# Altium PCB Main.PcbDoc
Units mm, origin at the board's own origin, x right, y up, seen from the top; angles counter-clockwise.
Board outline 99 x 71 mm, 4 copper layers (Top Layer, Ground Layer, Power Layer, Bottom Layer), stack 1.591 mm thick; 56 components, 26 nets, 200 pads, 145 vias.
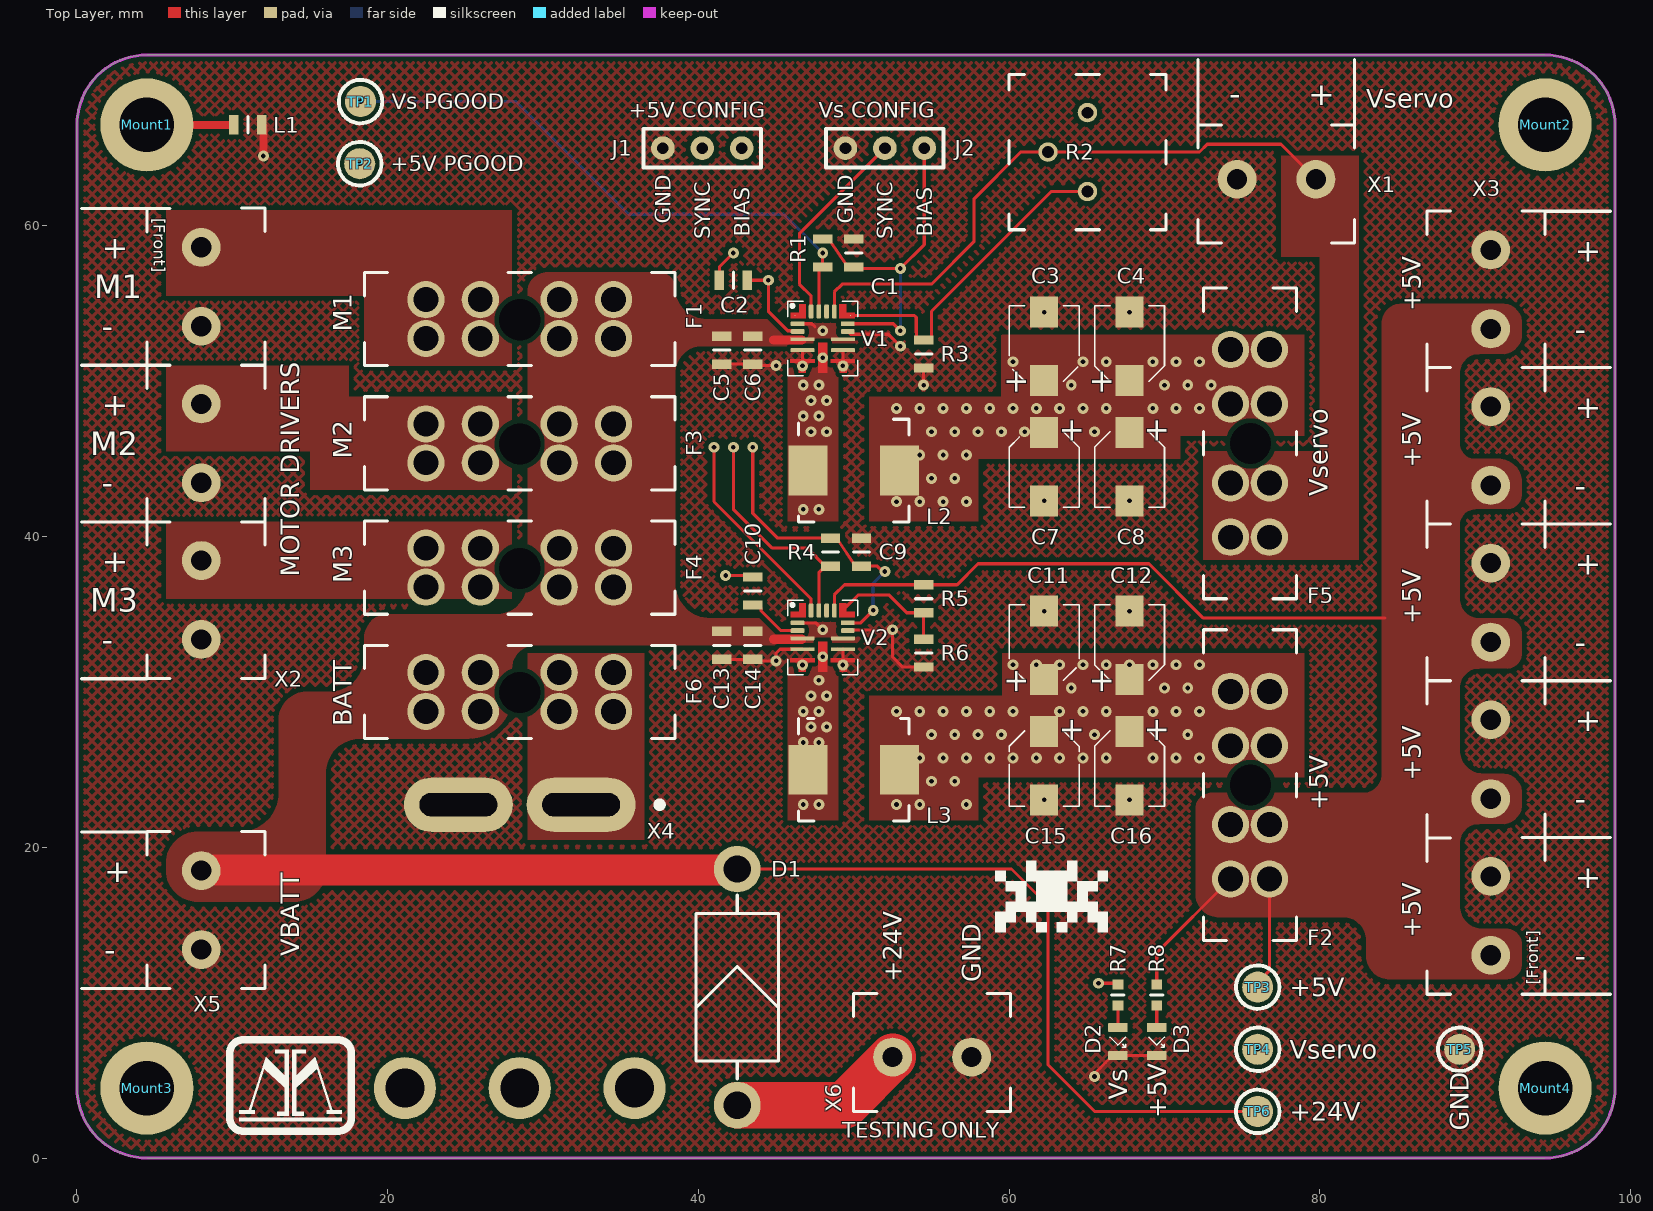
[diagram p0: Top Layer view]
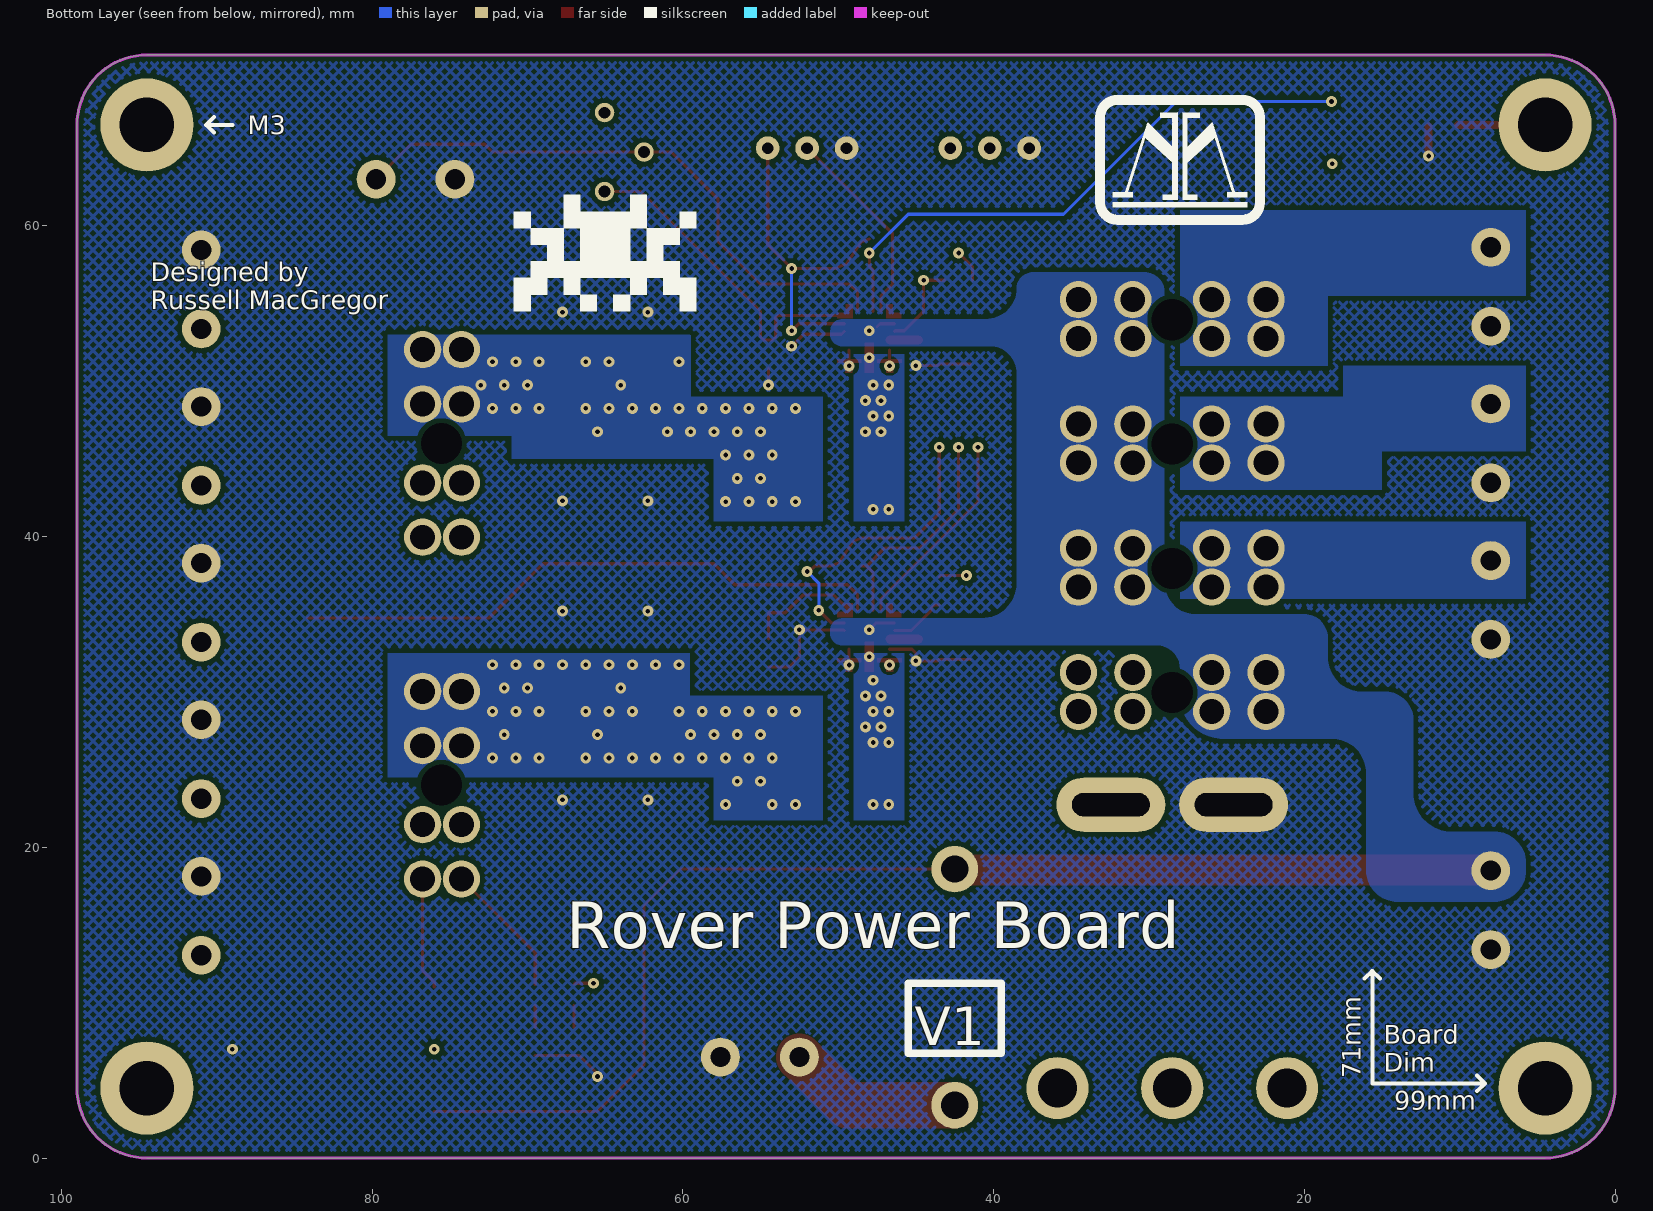
[diagram p1: Bottom Layer view, seen from below]
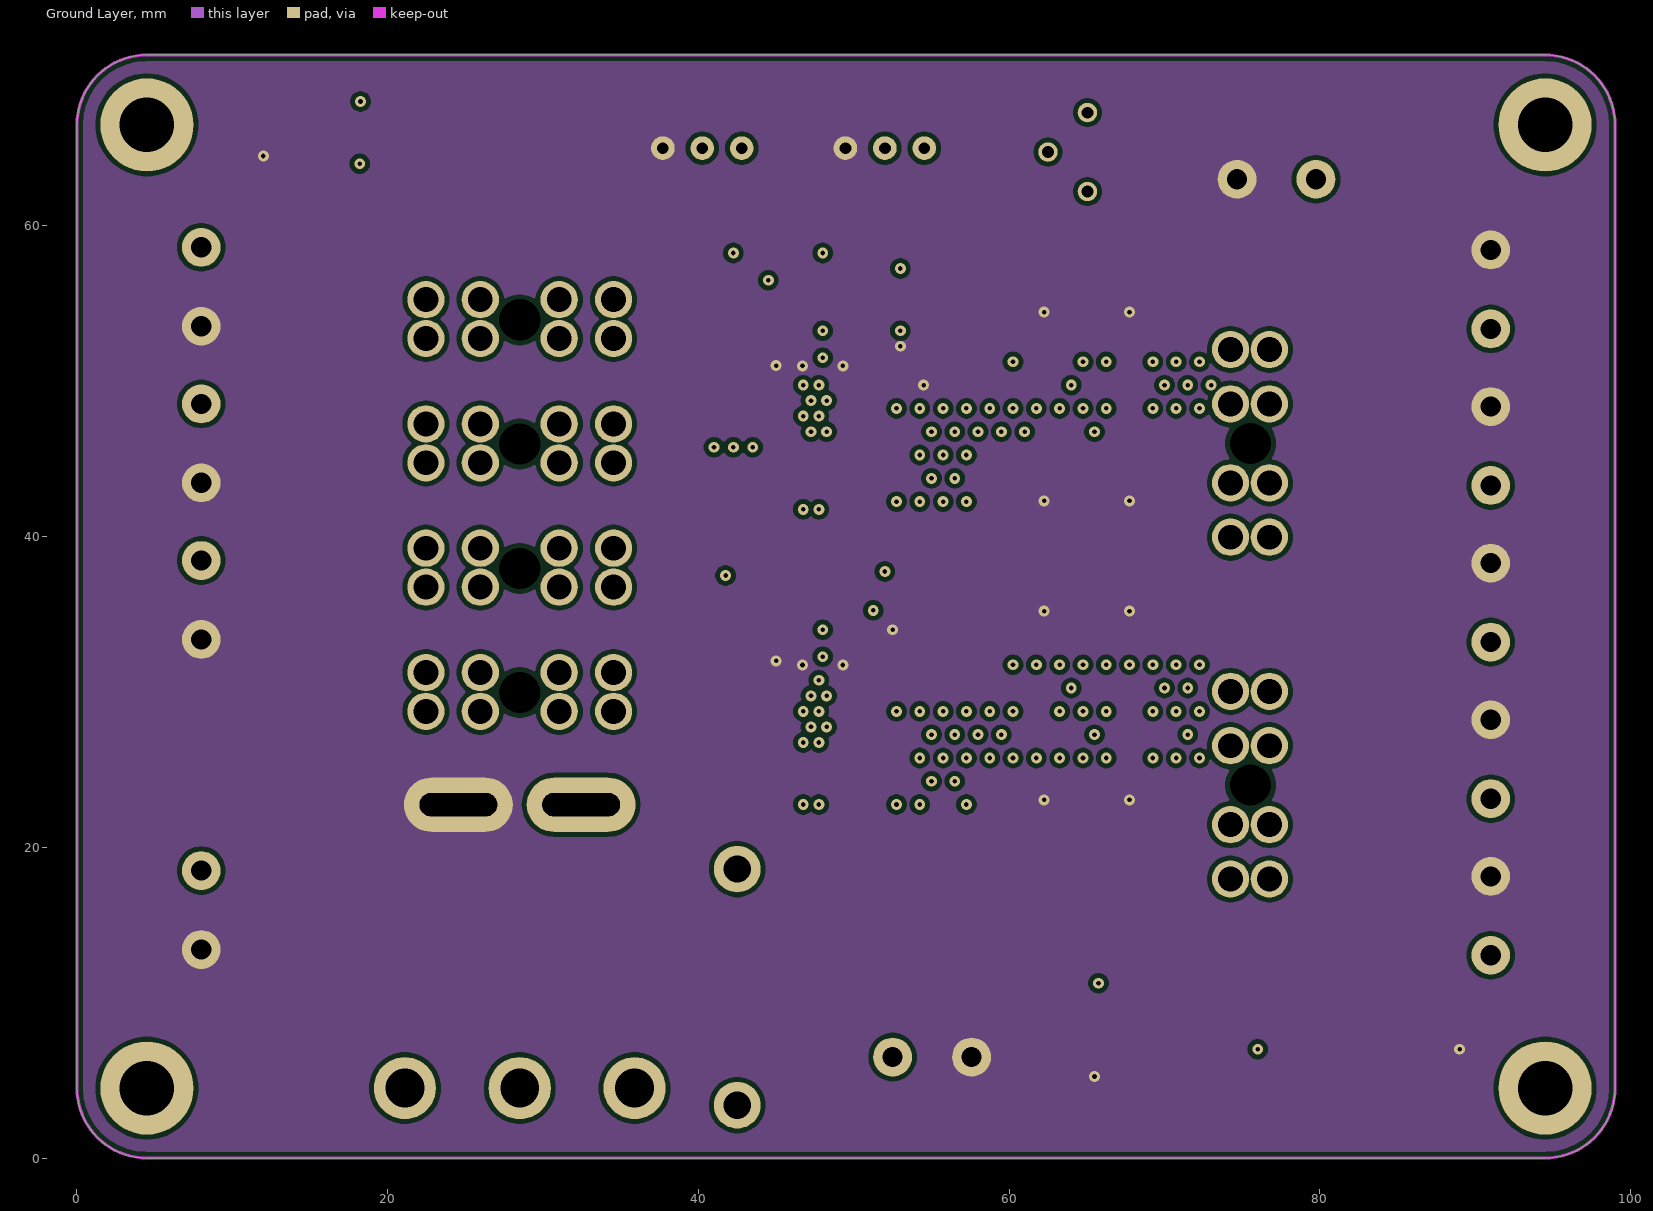
[diagram p2: Ground Layer]
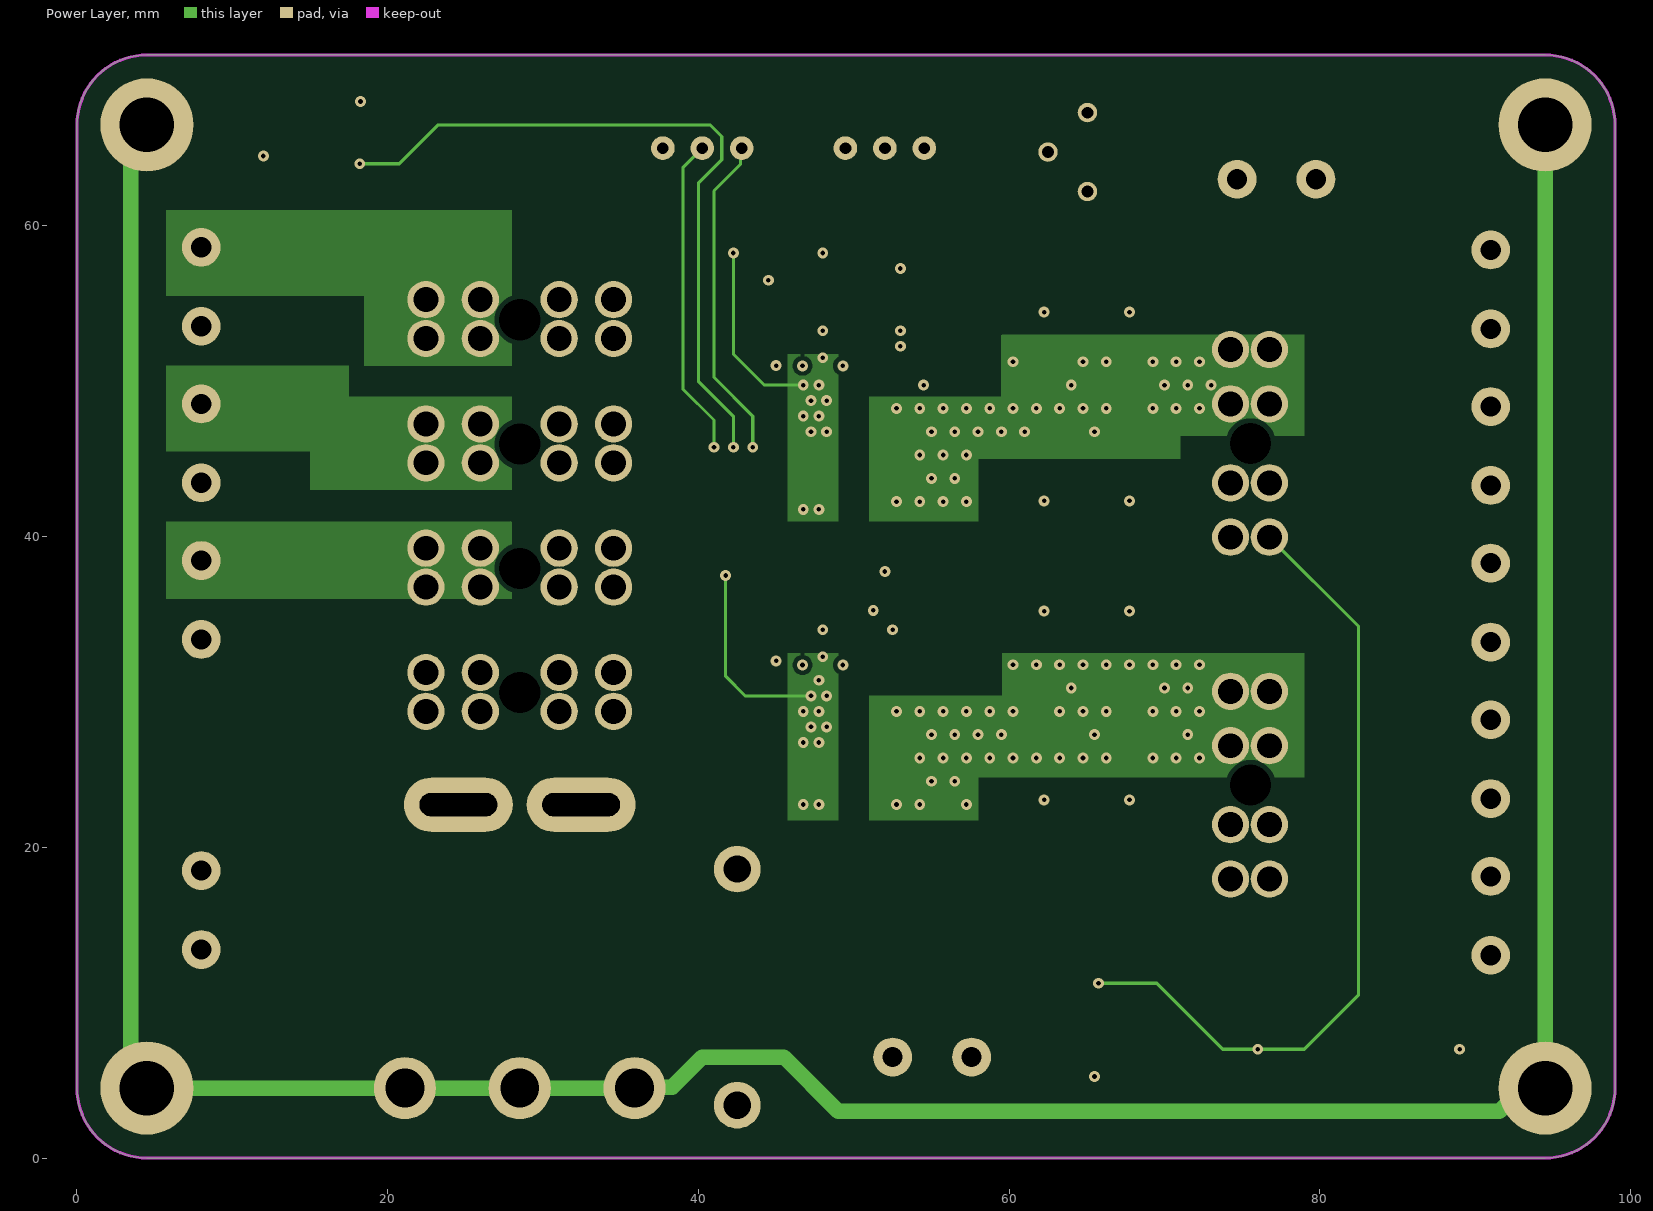
[diagram p3: Power Layer]

## Layer stack, top to bottom
Top Solder: solder mask 0.0102, Solder Resist, Dk 3.8
Top Layer: signal copper 0.035
Dielectric 2: prepreg 0.2104, 7628*1, Dk 4.4
Ground Layer: signal copper 0.0175
Dielectric 1: dielectric 1.065, FR-4, Dk 4.8
Power Layer: signal copper 0.0175
Dielectric 3: prepreg 0.2104, 7628*1, Dk 4.4
Bottom Layer: signal copper 0.035
Bottom Solder: solder mask 0.0102, Solder Resist, Dk 3.8

## Board outline
0,4.5 0,66.5 cw(c4.5,66.5) 4.5,71 94.5,71 cw(c94.5,66.5) 99,66.5 99,4.5 cw(c94.5,4.5) 94.5,0 4.5,0 cw(c4.5,4.5)

## Design rules (kind name [scope] priority, off if disabled: settings)
BoardOutlineClearance [All] p1: gap=0.2 ignorepadtopadclearanceinfootprint=FALSE
Clearance "inPolygon Clearance" [InPolygon] p1: gap=0.3 ignorepadtopadclearanceinfootprint=TRUE // this rule ensures that every net within a polygon of a different net has a set clearance from the poly
Clearance "Different Diff Pair" [All] p2: gap=0.2 ignorepadtopadclearanceinfootprint=TRUE
Clearance "Same Diff Pair" [All] p3: gap=0.1 ignorepadtopadclearanceinfootprint=TRUE
Clearance "Different Nets" [not InAnyDifferentialPair] p4: gap=0.3 ignorepadtopadclearanceinfootprint=TRUE except(0.1: Arc-SMDPad Arc-THPad Arc-Via Arc-Text Track-SMDPad Track-THPad Track-Via Track-Text SMDPad-Text THPad-Text Via-Text Fill-Text Poly-Text Region-Text Text-Text; 0.12: Arc-Arc Arc-Track Track-Track; 0.15: SMDPad-SMDPad SMDPad-THPad SMDPad-Via THPad-THPad THPad-Via Via-Via; 0.2: Arc-Hole Track-Hole SMDPad-Hole THPad-Hole Via-Hole Fill-Hole Poly-Hole Region-Hole Text-Hole)
Clearance "Same Net" [not InAnyDifferentialPair] p5: gap=0 ignorepadtopadclearanceinfootprint=TRUE except(0.1: THPad-Via; 0.18: Arc-Arc Arc-Track Track-Track)
ComponentClearance [All] p1: gap=0.102 collisioncheckmode=3 verticalgap=0.102 showdistances=TRUE
DiffPairsRouting "Ethernet Routing" [InDifferentialPairClass('Ethernet_Pairs')] p1: maxlimit=0.25 minlimit=0.2 mostfreqgap=0.25 toplayer_maxgap=0.2 toplayer_prefgap=0.2 toplayer_minwidth=0.25 toplayer_maxwidth=0.25 toplayer_prefwidth=0.25 midlayer1_mingap=0.25 midlayer1_minwidth=0.19 midlayer1_maxwidth=0.19 midlayer1_prefwidth=0.19 midlayer2_mingap=0.25 midlayer2_minwidth=0.19 midlayer2_maxwidth=0.19 midlayer2_prefwidth=0.19 bottomlayer_maxgap=0.2 bottomlayer_prefgap=0.2 bottomlayer_minwidth=0.25 bottomlayer_maxwidth=0.25 bottomlayer_prefwidth=0.25 impedanceprofiledriven=TRUE maxuncoupledlength=12.7
DiffPairsRouting "USB Routing" [InDifferentialPairClass('USB_Pairs')] p2: maxlimit=0.291 minlimit=0.127 mostfreqgap=0.291 toplayer_maxgap=0.127 toplayer_prefgap=0.127 toplayer_minwidth=0.23 toplayer_maxwidth=0.23 toplayer_prefwidth=0.23 midlayer1_mingap=0.291 midlayer1_minwidth=0.25 midlayer1_maxwidth=0.25 midlayer1_prefwidth=0.25 midlayer2_mingap=0.291 midlayer2_minwidth=0.25 midlayer2_maxwidth=0.25 midlayer2_prefwidth=0.25 bottomlayer_maxgap=0.127 bottomlayer_prefgap=0.127 bottomlayer_minwidth=0.23 bottomlayer_maxwidth=0.23 bottomlayer_prefwidth=0.23 maxuncoupledlength=12.7
DiffPairsRouting "CAN Routing" [InDifferentialPairClass('CAN_Pairs')] p3: maxlimit=0.907 minlimit=0.5 mostfreqgap=0.907 toplayer_maxgap=0.5 toplayer_prefgap=0.5 toplayer_minwidth=0.201 toplayer_maxwidth=0.201 toplayer_prefwidth=0.201 midlayer1_mingap=0.907 midlayer1_minwidth=0.155 midlayer1_maxwidth=0.155 midlayer1_prefwidth=0.155 midlayer2_mingap=0.907 midlayer2_minwidth=0.155 midlayer2_maxwidth=0.155 midlayer2_prefwidth=0.155 bottomlayer_maxgap=0.5 bottomlayer_prefgap=0.5 bottomlayer_minwidth=0.201 bottomlayer_maxwidth=0.201 bottomlayer_prefwidth=0.201 impedanceprofiledriven=TRUE maxuncoupledlength=12.7
Height [All] p1: minheight=0 maxheight=1816.048 prefheight=12.7
HoleSize [All] p1: absolutevalues=TRUE maxlimit=6.3 minlimit=0.3 maxpercent=80.000 minpercent=20.000
HoleToHoleClearance [All] p1: gap=0.25 allowstackedmicrovias=FALSE
Length [All] p1: maxlimit=43.432 minlimit=0 usedelayunits=TRUE mindelay=0.000000 maxdelay=10000.000000
MatchedLengths "Diff Pair Matched Delays" [InDifferentialPairClass('Ethernet_Pairs') or InDifferentialPairClass('USB_Pairs') or InDifferentialPairClass('CAN_Pairs')] p1: tolerance=5 checknetsindiffpair=TRUE checkdiffpairvsdiffpair=FALSE checkxsignals=FALSE checkothers=FALSE usedelayunits=TRUE delaytolerance=100.000000
MinimumAnnularRing [All] p1: minimumring=0.2
MinimumSolderMaskSliver [All] p1: minsoldermaskwidth=0
PlaneClearance "Supply Net Clearance" [InNetClass('Supply_Nets')] p1: clearance=0.5
PlaneClearance "All Nets" [All] p2: clearance=0.3
PolygonConnect "Supply Nets" [InNetClass('Supply_Nets')] p1: connectstyle=Direct reliefconductorwidth=0.3 reliefentries=4 polygonreliefangle="90 Angle" airgapwidth=0.254
PolygonConnect General [All] p2: connectstyle=Relief reliefconductorwidth=0.254 reliefentries=4 polygonreliefangle="90 Angle" airgapwidth=0.254
RoutingVias [All] p1: holewidth=0.2 width=0.35 viastyle="Through Hole" minholewidth=0.15 minwidth=0.3 maxholewidth=6.3 maxwidth=6.55
SilkToSilkClearance [All] p1: silktosilkclearance=0
SilkToSolderMaskClearance [All] p1: minsilkscreentomaskgap=0 clearancetoexposedcopper=TRUE
SolderMaskExpansion [All] p1: expansion=0.075 istentingtop=FALSE
SupplyNets "Schematic Supply Nets_2" [InNet('Vservo')] p1: voltage=0.000
SupplyNets "Schematic Supply Nets_6" [InNet('+24V Batt')] p2: voltage=0.000
SupplyNets "Schematic Supply Nets" [InNet('+5V')] p3: voltage=0.000
SupplyNets "Schematic Supply Nets_3" [InNet('GND')] p4: voltage=0.000
SupplyNets "Schematic Supply Nets_1" [InNet('Earth')] p5: voltage=0.000
UnRoutedNet [All] p1: checkbadconnections=TRUE
Width "nRF Width" [InNetClass('nRF Signal')] p1: maxlimit=0.379 minlimit=0.263 preferedwidth=0.379 toplayer_minwidth=0.379 midlayer1_maxwidth=0.263 midlayer1_prefwidth=0.263 midlayer2_maxwidth=0.263 midlayer2_prefwidth=0.263 bottomlayer_minwidth=0.379 impedanceprofiledriven=TRUE minimp=50.000000 maximp=50.000000 favimp=50.000000 checkconnectedcopper=TRUE
Width [All] p2: maxlimit=100 minlimit=0.1 preferedwidth=0.3
20 further rules are at their usual default settings.

## Classes and differential pairs
net class Supply_Nets: +5V "+5V Reg BIAS" "+5V Reg FB" "+5V Reg PGOOD" "+5V Reg SYNC" "+24V Batt" Earth GND "M1,2 Fused VIN" "M3,4 Fused VIN" "M5,6 Fused VIN" NetC2_1 NetC2_2 NetC3_1 NetC10_1 NetC10_2 NetC11_1 NetD1_2 NetF6_1 Vservo "Vservo Reg BIAS" "Vservo Reg FB" "Vservo Reg PGOOD" "Vservo Reg SYNC"
component class "Voltage Regulators": C1 C2 C3 C4 C5 C6 C7 C8 C9 C10 C11 C12 C13 C14 C15 C16 D2 D3 F2 F5 J1 J2 L2 L3 R1 R2 R3 R4 R5 R6 R7 R8 V1 V2
component class "Power Outputs": F1 F3 F4 X1 X2 X3 X5
component class "Power Inputs": D1 F6 X4 X6
component class Overview: L1 Mount1 Mount2 Mount3 Mount4 TP1 TP2 TP3 TP4 TP5 TP6

## Components (designator, comment, footprint, x,y, rotation, side; value= is the part's Value field where it differs from the comment)
C1 "SMD Nonpolarized" "[Cap] SMD 0805" 50,58.25 r270 top
C2 "SMD Nonpolarized" "[Cap] SMD 0805" 42.25,56.5 r180 top
C3 "SMD Polarized" "[Cap] SMD Polarized, 4mm" 62.25,52.25 r90 top
C4 "SMD Polarized" "[Cap] SMD Polarized, 4mm" 67.75,52.25 r90 top
C5 "SMD Nonpolarized" "[Cap] SMD 0805" 41.5,52 r90 top
C6 "SMD Nonpolarized" "[Cap] SMD 0805" 43.5,52 r90 top
C7 "SMD Polarized" "[Cap] SMD Polarized, 4mm" 62.25,44.5 r270 top
C8 "SMD Polarized" "[Cap] SMD Polarized, 4mm" 67.75,44.5 r270 top
C9 "SMD Nonpolarized" "[Cap] SMD 0805" 50.5,39 r270 top
C10 "SMD Nonpolarized" "[Cap] SMD 0805" 43.5,36.5 r90 top
C11 "SMD Polarized" "[Cap] SMD Polarized, 4mm" 62.25,33 r90 top
C12 "SMD Polarized" "[Cap] SMD Polarized, 4mm" 67.75,33 r90 top
C13 "SMD Nonpolarized" "[Cap] SMD 0805" 41.5,33 r90 top
C14 "SMD Nonpolarized" "[Cap] SMD 0805" 43.5,33 r90 top
C15 "SMD Polarized" "[Cap] SMD Polarized, 4mm" 62.25,25.25 r270 top
C16 "SMD Polarized" "[Cap] SMD Polarized, 4mm" 67.75,25.25 r270 top
D1 "1N5822" "[Diode] Thru-Hole Schottky" 42.5,11 r270 top
D2 "SMD LED" "[LED] SMD 0805" 67,7.5 r270 top
D3 "SMD LED" "[LED] SMD 0805" 69.5,7.5 r270 top
F1 "Thru-Hole" "[Fuse] Thru-Hole Blade" 28.5,54 r180 top
F2 "Thru-Hole" "[Fuse] Thru-Hole Blade" 75.5,46 r270 top
F3 "Thru-Hole" "[Fuse] Thru-Hole Blade" 28.5,46 r180 top
F4 "Thru-Hole" "[Fuse] Thru-Hole Blade" 28.5,38 r180 top
F5 "Thru-Hole" "[Fuse] Thru-Hole Blade" 75.5,24 r270 top
F6 "Thru-Hole" "[Fuse] Thru-Hole Blade" 28.5,30 r180 top
J1 "Normal pos: 2-3 shorted" "[Jumper] Thru-Hole 3pin" 40.25,65 r180 top
J2 "Normal pos: 2-3 shorted" "[Jumper] Thru-Hole 3pin" 52,65 r180 top
L1 "652-MH2029-300Y" "[Ferrite] SMD Bead 0805 (1)" 11,66.5 r0 top
L2 "SMD Inductor" "[Inductor] 7.4 X 6.6 X 3 MM" 50,44.25 r0 top
L3 "SMD Inductor" "[Inductor] 7.4 X 6.6 X 3 MM" 50,25 r0 top
Mount1 "M3 Mount Hole" "[Mount] M3 Mount Hole" 4.5,66.5 r0 top
Mount2 "M3 Mount Hole" "[Mount] M3 Mount Hole" 94.5,66.5 r0 top
Mount3 "M3 Mount Hole" "[Mount] M3 Mount Hole" 4.5,4.5 r0 top
Mount4 "M3 Mount Hole" "[Mount] M3 Mount Hole" 94.5,4.5 r0 top
R1 "[Res] SMD Resistor" "[Res] SMD 0805" 48,58.25 r270 top
R2 "0-100k Pot" "[Res] Pot 100k 0.5W" 62.5,64.75 r90 top
R3 "[Res] SMD Resistor" "[Res] SMD 0805" 54.5,51.75 r90 top
R4 "[Res] SMD Resistor" "[Res] SMD 0805" 48.5,39 r270 top
R5 "[Res] SMD Resistor" "[Res] SMD 0805" 54.5,36 r90 top
R6 "[Res] SMD Resistor" "[Res] SMD 0805" 54.5,32.5 r90 top
R7 "[Res] SMD Resistor" "[Res] SMD 0603" 67,10.5 r90 top
R8 "[Res] SMD Resistor" "[Res] SMD 0603" 69.5,10.5 r90 top
TP1 "Probe Pad" "[Probe] Touch Pad" 18.25,68 r0 top
TP2 "Probe Pad" "[Probe] Touch Pad" 18.2,64 r0 top
TP3 "Probe Pad" "[Probe] Touch Pad" 76,11 r0 top
TP4 "Probe Pad" "[Probe] Touch Pad" 76,7 r0 top
TP5 "Probe Pad" "[Probe] Touch Pad" 89,7 r0 top
TP6 "Probe Pad" "[Probe] Touch Pad" 76,3 r0 top
V1 "[Reg Sw] 0.8-10V Adjustable Buck" "[Reg] 0.8-10V Adjustable Buck" 48,52.75 r0 top
V2 "[Reg Sw] 0.8-10V Adjustable Buck" "[Reg] 0.8-10V Adjustable Buck" 48,33.5 r0 top
X1 "2pin Screw Terminal" "[Screw Terminal] 2pin 5mm" 77.25,63 r180 top
X2 "[Screw Terminal] 6pin" "[Screw Terminal] 6pin" 8,46 r270 top
X3 "[Screw Terminal] 10pin" "[Screw Terminal] 10pin" 91,35.75 r90 top
X4 "Anderson 2pos" "[Anderson] 2pos Right-Angle 1327G17" 28.5,4.5 r0 top
X5 "2pin Screw Terminal" "[Screw Terminal] 2pin 5mm" 8,16 r270 top
X6 "2pin Screw Terminal" "[Screw Terminal] 2pin 5mm" 55,6.5 r0 top

## Footprints (in the part's own frame and the unit in brackets; to place one, negate y for a bottom-side part, rotate by r counter-clockwise, add the part's x,y. Pads: shape width x height; smd on the part's side, far side on the other; paste and mask are expansions set on the pad)
"[Anderson] 2pos Right-Angle 1327G17" [mm]
  oval 7x3.5 hole 1.5 slot 5 at 0 deg: 1(3.95,18.24) 2(-3.95,18.24)
  round 4 hole 2.5: MH(-7.39,0) MH(0,0) MH(7.39,0)
  silkscreen extent 8.8,18.04 9.2,18.44, body extent -8.4,-9.86 7.9,18.74, height 8.4
"[Cap] SMD 0805" [mm]
  rect 0.6x1.25 smd: 1(-0.9,0) 2(0.9,0)
  silkscreen extent 0,-0.53 0,0.53, body extent -1,-0.63 1,0.63, height 1
"[Cap] SMD Polarized, 4mm" [mm]
  rect 2x1.8 smd: 1(-2.2,0) 2(2.2,0)
  silkscreen extent -2.25,-2.25 2.6,2.25, body extent -2.6,-2.25 2.6,2.25, height 5.66
"[Diode] Thru-Hole Schottky" [mm] "1N5822"
  round 3 hole 1.75: 1(-7.6,0) 2(7.6,0)
  silkscreen extent -5.92,-2.66 5.92,2.65, body extent -8.27,-2.66 8.27,2.66, height 7.16
"[Ferrite] SMD Bead 0805 (1)" [mm]
  rect 0.6x1.25 smd: 1(-0.9,0) 2(0.9,0)
  silkscreen extent 0,-0.53 0,0.53, body extent -1,-0.6 1,0.6, height 1.1
"[Fuse] Thru-Hole Blade" [mm]
  round 2.4 hole 1.6: 1(-6.04,-1.25) 1(-6.04,1.25) 1(-2.54,-1.25) 1(-2.54,1.25) 2(2.54,-1.25) 2(2.54,1.25) 2(6.04,-1.25) 2(6.04,1.25)
  round 1.325 hole 2.65 unplated: ""(0,0.045)
  silkscreen extent -10,-3 10,3, body extent -10,-3 10,3, height 18.03
"[Inductor] 7.4 X 6.6 X 3 MM" [mm]
  rect 2.5x3.2 smd: 1(-2.95,0) 2(2.95,0)
  silkscreen extent -3.55,-3.3 3.55,3.3, body extent -3.55,-3.3 3.55,3.3, height 3
"[Jumper] Thru-Hole 3pin" [mil]
  round 60 hole 30: 1(-100,0) 2(0,0) 3(100,0)
  silkscreen extent -149,-49 149,49, body extent -150,-50 150,50, height 374
"[LED] SMD 0805" [mm]
  rrect20% 0.6x1.25 smd: 1(-0.9,0) 2(0.9,0)
  silkscreen extent -0.28,-0.51 0.37,0.51, body extent -1,-0.65 1,0.65, height 0.8
"[Mount] M3 Mount Hole" [mm] "Place at least 4.5mm from board edge. Plated."
  round 6 hole 3.5: 1(0,0)
"[Probe] Touch Pad" [mm]
  round 2 smd: 1(0,0)
  silkscreen extent -1.4,-1.4 1.4,1.4
"[Reg] 0.8-10V Adjustable Buck" [mm] "MAX20408AFOF/VY+"
  rrect50% 0.9x0.3 smd: 1(-1.612,0.95) 2(-1.612,0.45) 10(1.612,0.45) 11(1.612,0.95)
  rrect50% 1.55x0.25 smd: 3(-1.299,-0.05) 4(-1.299,-0.75) 8(1.3,-0.75) 9(1.3,-0.05)
  round 0.025 smd: 5(-1.3,-1.763) 6(0,-1.238) 7(1.3,-1.763) 12(1.3,1.75) 12(1.787,1.475) 17(-1.788,1.475) 17(-1.3,1.75)
  rect 0.127x0.127 smd paste-0.064 mask-0.064: 10(1.612,0.45) 11(1.612,0.95)
  rrect50% 0.3x0.9 smd: 13(0.75,1.736) 14(0.25,1.736) 15(-0.25,1.737) 16(-0.75,1.737)
  Top Layer region: -0.3,-0.275 0.3,-0.275 0.3,-2.2 -0.3,-2.2
  Top Layer region: -1.1,-1.575 -0.525,-1.575 -0.525,-1.325 -2.075,-1.325 -2.075,-1.575 -1.55,-1.575 -1.55,-2.2 -1.1,-2.2
  Top Layer region: 1.1,-1.575 0.525,-1.575 0.525,-1.325 2.075,-1.325 2.075,-1.575 1.55,-1.575 1.55,-2.2 1.1,-2.2
  Top Layer region: -1.525,1.65 -1.525,1.3 -1.075,1.3 -1.075,2.2 -1.525,2.2
  Top Layer region: -2.05,1.65 -1.525,1.65 -1.525,1.3 -2.05,1.3
  Top Layer region: 1.525,1.65 1.525,1.3 1.075,1.3 1.075,2.2 1.525,2.2
  Top Layer region: 2.05,1.65 1.525,1.65 1.525,1.3 2.05,1.3
  silkscreen extent -2.25,-2.4 2.25,2.4, body extent -1.75,-1.88 1.75,1.88, height 0.8
"[Res] Pot 100k 0.5W" [mm]
  round 1.25 hole 0.75: 1(2.54,-2.54) 2(0,0) 3(-2.54,-2.54)
  silkscreen extent -5,-7.6 5,2.5, body extent -4.73,-7.32 4.8,2.21, height 4.76
"[Res] SMD 0603" [mm]
  rect 0.65x0.7 smd: 1(-0.675,0) 2(0.675,0)
  silkscreen extent 0,-0.4 0,0.4, body extent -0.8,-0.45 0.8,0.45, height 0.8
"[Res] SMD 0805" [mm]
  rect 0.6x1.25 smd: 1(-0.9,0) 2(0.9,0)
  body extent -1,-0.63 1,0.63, height 0.5
"[Screw Terminal] 2pin 5mm" [mm]
  round 2.5 hole 1.3: 1(-2.5,0) 2(2.58,0)
  silkscreen extent -4.99,-3.5 5.09,4.1, body extent -5.45,-3.5 5.05,4.1, height 9.99
"[Screw Terminal] 6pin" [mm]
  round 2.5 hole 1.3: 1(-12.62,0) 2(-7.54,0) 3(-2.54,0) 4(2.54,0) 5(7.54,0) 6(12.62,0)
  silkscreen extent -15.15,-3.5 15.13,4.1, body extent -15.53,-3.5 15.13,4.1, height 9.99
"[Screw Terminal] 10pin" [mm]
  round 2.5 hole 1.3: 1(-22.7,0) 2(-17.62,0) 3(-12.62,0) 4(-7.54,0) 5(-2.54,0) 6(2.54,0) 7(7.54,0) 8(12.62,0) 9(17.62,0) 10(22.7,0)
  silkscreen extent -25.21,-3.5 25.21,4.1, body extent -25.65,-3.5 25.21,4.1, height 9.99

## Part data
C1 C9: library part "[Cap] SMD Nonpolarized", Capacitance=2.2uF, Size Package=0805, Supplier Part Number 1=587-3169-1-ND, Tolerance=10%, Voltage=50V, Supplier 1=DigiKey
C2 C5 C10 C13: library part "[Cap] SMD Nonpolarized", Capacitance=100nF, Size Package=0805, Supplier Part Number 1=1276-1003-6-ND, Tolerance=10%, Voltage=50V, Supplier 1=DigiKey
C3 C4 C7 C8 C11 C12 C15 C16: library part "[Cap] SMD Polarized", Capacitance=47uF, Max Voltage=50V, Supplier Part Number 1=10-EEE-FN1A470URCT-ND, Tolerance=20%, Diameter=4mm, Supplier 1=DigiKey
C6 C14: library part "[Cap] SMD Nonpolarized", Capacitance=4.7uF, Size Package=0805, Supplier Part Number 1=490-12394-1-ND, Tolerance=10%, Voltage=50V, Supplier 1=DigiKey
D1: library part "[Diode] Thru-Hole Schottky", Supplier Part Number 1=1N5822GOS-ND, Mouser Part #=511-1N5822, Supplier 1=DigiKey
D2 D3: library part "[LED] SMD", "Generic", Color=Green, Size Package=0805, Supplier Part Number 1=475-LGR971-KN-1CT-ND, Supplier 1=DigiKey
F1 F3 F4 F6: library part "[Fuse] Thru-Hole Blade", Capacity=20A, Supplier Part Number 1=WK6265-ND, Supplier 1=DigiKey
F2 F5: library part "[Fuse] Thru-Hole Blade", Capacity=7.5A, Supplier Part Number 1=WK6265-ND, Supplier 1=DigiKey
J1 J2: library part "[Jump] Thru-Hole 3pin", "Clip Jumper", NO/NC="2,3 NC"
L1: library part "[Ferrite] SMD Ferrite Bead (1)", Res @ Freq="30 @ 100MHz", Size Package=0805, Supplier Part Number 1=MH2029-300YCT-ND, Supplier 1=DigiKey
L2 L3: library part "[Inductor] SMD Inductor", Inductance=2.2uH, Size Package=Nonstandard, Supplier Part Number 1=XC2402CT-ND, Supplier 1=DigiKey
Mount1 Mount2 Mount3 Mount4: library part "[Mount] M3 Mount Hole", "Place at least 4.5mm from board edge. Plated."
R1 R4: "Generic", Resistance=1k, Size Package=0805, Supplier Part Number 1=RR12P1.0KDCT-ND, Supplier 1=DigiKey
R2: library part "[Res] Pot 100k 0.5W", Supplier Part Number 1=3386P-104LF-ND, Supplier 1=DigiKey
R3 R6: "Generic", Resistance=10k, Size Package=0805, Supplier Part Number 1=311-10KARCT-ND, Tolerance=1%, Supplier 1=DigiKey
R5: "Generic", Resistance=52.5k, Size Package=0805, Supplier Part Number 1=311-52.3KCRCT-ND, Tolerance=1%, Supplier 1=DigiKey
R7 R8: "Generic", Resistance=220, Size Package=0603, Supplier Part Number 1=311-220HRCT-ND, Tolerance=1%, Supplier 1=DigiKey
TP1 TP2 TP3 TP4 TP5 TP6: library part "[Probe] Touch Pad"
V1 V2: "MAX20408AFOF/VY+", Supplier Part Number 1=505-MAX20408AFOF/VY+-ND, Supplier 1=DigiKey
X1 X5 X6: library part "[Screw Terminal] 2pin", Supplier Part Number 1=102-6145-ND, Supplier 1=DigiKey
X2: "x3", Supplier Part Number 1=102-6145-ND, Supplier 1=DigiKey
X3: "x5", Supplier Part Number 1=102-6145-ND, Supplier 1=DigiKey
X4: library part "[Anderson] 2pos Right-Angle 1327G17"

## Via types
v1: diameter 0.7, hole 0.3, Top Layer to Bottom Layer, 145 vias

## Nets (pads, with @x,y where several pads share a name; then routed paths per layer and width w, separated by ;. In a path a pad name is that pad's centre, name@x,y a point inside that pad or via, vN(x,y) a via of type N, cw(c..) or ccw(c..) an arc to the next point about the centre after c; other vN are vias at no path point)
+5V: F5.2 R5.2 R8.2 TP3.1 V2.13 X3.1 X3.3 X3.5 X3.7 X3.9 | length 54.8
  Top Layer w0.2: V2.13 48.75,36.25 49.4,36.9 R5.2 56.65,36.9 58,38.25 69,38.25 72.5,34.75 84.204,34.75 ; R8.2 69.5,13.21 F5.2@74.25,17.96 ; TP3.1 76,11.31 76.75,12.06 F5.2@76.75,17.96
"+5V Reg BIAS": C9.2 J1.1 R4.1 V2.11 | length 40.2
  Top Layer w0.2: v1(43.5,45.75) 43.5,41.5 45.1,39.9 R4.1 49.025,39.7 49.975,38.3 C9.2 51.515,38.1 51.865,37.75 v1(52,37.75) ; V2.11@49.612,34.45 50.45,34.45 v1(51.25,35.25)
  Power Layer w0.2: J1.1 42.708,64.918 42.708,63.958 41,62.25 41,50.25 43.5,47.75 v1(43.5,45.75)
  Bottom Layer w0.2: v1(51.25,35.25) 51.25,37 v1(52,37.75)
"+5V Reg FB": R5.1 R6.2 V2.12 | length 8.4
  Top Layer w0.2: V2.12@49.787,34.975 49.575,34.975 49.3,35.25 50.3,36.25 52.25,36.25 53.4,35.1 R5.1 R6.2
"+5V Reg PGOOD": R4.2 TP2.1 V2.15 | length 61
  Top Layer w0.2: v1(42.25,45.75) 42.25,41.75 44.725,39.275 47,39.275 R4.2@48.175,38.1 ; V2.15 47.75,37.675 R4.2@48.175,38.1 ; R4.2 R4.2@48.175,38.1
  Power Layer w0.2: v1(18.2,64) 20.25,64 20.75,64 23.25,66.5 40.75,66.5 41.5,65.75 41.5,64.25 40,62.75 40,50 42.25,47.75 v1(42.25,45.75)
"+5V Reg SYNC": J1.2 V2.16 | length 33.7
  Top Layer w0.2: v1(41,45.75) 41,42.25 47.25,36 V2.16
  Power Layer w0.2: J1.2 39,63.75 39,49.5 41,47.5 v1(41,45.75)
"+24V Batt": C5.2 C6.2 C13.2 C14.2 D1.1 F1.1 F3.1 F4.1 F6.2 TP6.1 V1.1 V1.3 V1.9 V2.1 V2.3 V2.9 X5.1 | length 87.1
  Top Layer w0.2: X5.1 X5.1@8.05,18.55 ; D1.1@42.45,18.55 D1.1 60.15,18.6 62.5,16.25 62.5,6 65.5,3 TP6.1 ; V2.1 47.55,34.45 v1(48,34) ; V1.1 47.3,53.7 47.5,53.5
  Top Layer w0.6: 44.85,33.4 V2.3@46.651,33.4 ; 44.85,52.65 V1.3@46.651,52.65
  Top Layer w2: X5.1@8.05,18.55 D1.1@42.45,18.55
  other v1: 48,53.25
Earth: L1.1 Mount1.1 Mount2.1 Mount3.1 Mount4.1 X4.MH | length 223.4
  Top Layer w0.5: Mount1.1 L1.1
  Power Layer w1: Mount1.1 3.448,65.448 3.448,5.552 Mount3.1 21.11,4.5 28.5,4.5 35.89,4.5 35.96,4.57 38.32,4.57 40.25,6.5 45.5,6.5 49,3 91.551,3 93.051,4.5 Mount4.1 Mount2.1
GND: C1.1 C3.2 C4.2 C5.1 C6.1 C7.2 C8.2 C9.1 C11.2 C12.2 C13.1 C14.1 C15.2 C16.2 D2.2 D3.2 J1.3 J2.3 L1.2 R3.1 R6.1 TP5.1 V1.4 V1.5 V1.7 V1.8 V1.10 V2.4 V2.5 V2.7 V2.8 V2.10 X1.2 X2.2 X2.4 X2.6 X3.2 X3.4 X3.6 X3.8 X3.10 X4.2 X5.2 X6.2 | length 30.9
  Top Layer w0.2: L1.2 L1.2@12,66.4 ; C13.1 C14.1 43.6,32 v1(45,32) 45.005,32.005 45.005,32.505 45.25,32.75 V2.4 ; C5.1 C6.1 43.6,51 v1(45,51) ; v1(46.7,50.988) V1.4 V1.4 ; v1(49.3,50.988) V1.8 ; v1(49.3,31.737) V2.8@49.3,32.75 ; V2.10@49.612,33.95 49.637,33.975 52.475,33.975 v1(52.5,34) 52.5,32.25 53.15,31.6 R6.1 ; V1.10@49.612,53.2 49.787,53.025 52.225,53.025 v1(53,52.25) ; v1(54.5,49.75) R3.1 ; v1(65.5,5.25) 65.596,5.346 65.596,5.521 66.675,6.6 D2.2 D3.2
  Top Layer w0.5: v1(12,64.5) L1.2@12,66.4
  other v1: 89,7 62.25,23.05 67.75,23.05 46.7,31.737 62.25,35.2 67.75,35.2 62.25,42.3 67.75,42.3 62.25,54.45 67.75,54.45
"M1,2 Fused VIN": F1.2 X2.1
"M3,4 Fused VIN": F3.2 X2.3
"M5,6 Fused VIN": F4.2 X2.5
NetC2_1: C2.1 V1.2 | length 5.9
  Top Layer w0.2: C2.1 v1(44.5,56.5) 44.5,54.5 45.75,53.25 46.338,53.25 V1.2
  Bottom Layer w0.2: v1(44.5,56.5) v1@44.596,56.404
NetC2_2: C2.2 L2.1 V1.6 | length 14
  Top Layer w0.2: C2.2 41.35,57.35 v1(42.25,58.25)
  Power Layer w0.2: v1(42.25,58.25) 42.25,51.75 44.25,49.75 v1(46.75,49.75)
  other v1: 46.75,41.75 47.75,41.75 47.25,46.75 48.25,46.75 46.75,47.75 47.75,47.75 47.25,48.75 48.25,48.75 47.75,49.75 48,51.512
NetC3_1: C3.1 C4.1 C7.1 C8.1 F2.1 L2.2
  other v1: 52.75,42.25 54.25,42.25 55.75,42.25 57.25,42.25 55,43.75 56.5,43.75 54.25,45.25 55.75,45.25 57.25,45.25 55,46.75 56.5,46.75 58,46.75 59.5,46.75 61,46.75 65.5,46.75 52.75,48.25 54.25,48.25 55.75,48.25 57.25,48.25 58.75,48.25 60.25,48.25 61.75,48.25 63.25,48.25 64.75,48.25 66.25,48.25 69.25,48.25 70.75,48.25 72.25,48.25 64,49.75 70,49.75 71.5,49.75 73,49.75 60.25,51.25 64.75,51.25 66.25,51.25 69.25,51.25 70.75,51.25 72.25,51.25
NetC10_1: C10.1 V2.2 | length 3.7
  Top Layer w0.2: C10.1 43.825,35.6 44.025,35.4 44.025,35.225 45.3,33.95 V2.2
NetC10_2: C10.2 L3.1 V2.6 | length 14.3
  Top Layer w0.2: v1(41.75,37.5) 43.4,37.5 C10.2
  Power Layer w0.2: v1(41.75,37.5) 41.75,31 43,29.75 v1(47.25,29.75)
  other v1: 46.75,22.75 47.75,22.75 46.75,26.75 47.75,26.75 47.25,27.75 48.25,27.75 46.75,28.75 47.75,28.75 48.25,29.75 47.75,30.75 48,32.262
NetC11_1: C11.1 C12.1 C15.1 C16.1 F5.1 L3.2
  other v1: 52.75,22.75 54.25,22.75 57.25,22.75 55,24.25 56.5,24.25 54.25,25.75 55.75,25.75 57.25,25.75 58.75,25.75 60.25,25.75 61.75,25.75 63.25,25.75 64.75,25.75 66.25,25.75 69.25,25.75 70.75,25.75 72.25,25.75 55,27.25 56.5,27.25 58,27.25 59.5,27.25 65.5,27.25 71.5,27.25 52.75,28.75 54.25,28.75 55.75,28.75 57.25,28.75 58.75,28.75 60.25,28.75 63.25,28.75 64.75,28.75 66.25,28.75 69.25,28.75 70.75,28.75 72.25,28.75 64,30.25 70,30.25 71.5,30.25 60.25,31.75 61.75,31.75 63.25,31.75 64.75,31.75 66.25,31.75 67.75,31.75 69.25,31.75 70.75,31.75 72.25,31.75
NetD1_2: D1.2 X6.1 | length 11.3
  Top Layer w3: D1.2 49.4,3.4 X6.1
NetD2_1: D2.1 R7.1 | length 1.4
  Top Layer w0.2: D2.1 R7.1
NetD3_1: D3.1 R8.1 | length 1.4
  Top Layer w0.2: D3.1 R8.1
NetF6_1: F6.1 X4.1
Vservo: F2.2 R2.2 R7.2 TP4.1 V1.13 X1.1 | length 91.8
  Top Layer w0.2: V1.13 48.75,55.75 49.25,56.25 55,56.25 57.75,59 57.75,61.75 60.75,64.75 R2.2 72.25,64.75 72.75,65.25 77.5,65.25 X1.1 ; v1(65.75,11.25) 66.925,11.25 R7.2
  Power Layer w0.2: v1(65.75,11.25) 69.5,11.25 73.75,7 v1(76,7) 79,7 82.5,10.5 82.5,34.21 F2.2@76.75,39.96
"Vservo Reg BIAS": C1.2 J2.1 R1.1 V1.11 | length 21.8
  Top Layer w0.2: R1.1 48.525,58.95 49.475,57.55 C1.2 50.099,57.25 v1(53,57.25) 54.54,58.791 J2.1 ; V1.11@49.612,53.7 52.55,53.7 v1(53,53.25)
  Bottom Layer w0.2: v1(53,53.25) v1@53,57.25
"Vservo Reg FB": R2.3 R3.2 V1.12 | length 22.3
  Top Layer w0.2: V1.12@49.3,54.5 49.3,54.3 49.375,54.225 49.787,54.225 53.914,54.225 54.025,54.114 54.025,53.125 54.031,53.119 54.031,52.85 54.231,52.65 54.8,52.65 55,52.85 55,54.5 62.71,62.21 R2.3
"Vservo Reg PGOOD": R1.2 TP1.1 V1.15 | length 37.7
  Top Layer w0.2: V1.15 47.75,57.15 47.95,57.35 R1.2 ; R1.2@48,57.35 v1(48,58.25)
  Bottom Layer w0.2: v1(18.25,68) 28.25,68 31.25,65 35.5,60.75 45.5,60.75 v1(48,58.25)
"Vservo Reg SYNC": J2.2 V1.16 | length 13.1
  Top Layer w0.2: V1.16 47.25,55.5 46.5,56.25 46.5,59.5 J2.2
pads on no net: F1. F2. F3. F4. F5. F6. R2.1 V1.14 V1.17 V2.14 V2.17

## Polygon pours and split planes (outlines as drawn)
GND on Top Layer "GND Top Poly" (hatched 45Degree grid 0.508 track 0.203, remove dead copper, pour order 44): 0,71 99,71 99,0 0,0
Vservo on Top Layer "+8V4 Top Poly" (solid, remove dead copper, pour order 42): 72.5,45.5 80,45.5 80,58 77.5,58 77.5,64.5 82.5,64.5 82.5,38.5 72.5,38.5
Vservo on Top Layer "+8V4 Top Poly" (solid, remove dead copper, pour order 38): 72.5,45.5 80,45.5 80,58 77.5,58 77.5,64.5 82.5,64.5 82.5,38.5 72.5,38.5
+5V on Top Layer "+5V Middle 2 Poly" (solid, remove dead copper, pour order 36): 72,22.5 72,17 ccw(c73.5,17) 73.5,15.5 81.5,15.5 cw(c81.5,14) 83,14 83,13 ccw(c84.5,13) 84.5,11.5 92,11.5 ccw(c92,12.5) 93,12.5 93,13.75 ccw(c92,13.75) 92,14.75 90.5,14.75 cw(c90.5,16.25) 89,16.25 89,20.25 cw(c90.25,20.25) 90.25,21.5 91.75,21.5 ccw(c91.75,22.75) 93,22.75 93,23.5 ccw(c91.75,23.5) 91.75,24.75 90.5,24.75 cw(c90.5,26.25) 89,26.25 89,30.25 cw(c90.25,30.25) 90.25,31.5 92,31.5 ccw(c92,32.5) 93,32.5 93,33.75 ccw(c92,33.75) 92,34.75 90.25,34.75 cw(c90.25,36) 89,36 89,40.75 cw(c90,40.75) 90,41.75 92,41.75 ccw(c92,42.75) 93,42.75 93,43.5 ccw(c91.5,43.5) 91.5,45 90,45 cw(c90,46) 89,46 89,50.5 cw(c90.25,50.5) 90.25,51.75 91.75,51.75 ccw(c91.75,53) 93,53 93,53.75 ccw(c91.75,53.75) 91.75,55 85.25,55 ccw(c85.25,53.75) 84,53.75 84,24.75 cw(c82.75,24.75) 82.75,23.5 73,23.5 ccw(c73,22.5)
+5V on Top Layer "+5V Top Poly" (solid, remove dead copper, pour order 35): 72,22.5 72,17 ccw(c73.5,17) 73.5,15.5 81.5,15.5 cw(c81.5,14) 83,14 83,13 ccw(c84.5,13) 84.5,11.5 92,11.5 ccw(c92,12.5) 93,12.5 93,13.75 ccw(c92,13.75) 92,14.75 90.5,14.75 cw(c90.5,16.25) 89,16.25 89,20.25 cw(c90.25,20.25) 90.25,21.5 91.75,21.5 ccw(c91.75,22.75) 93,22.75 93,23.5 ccw(c91.75,23.5) 91.75,24.75 90.5,24.75 cw(c90.5,26.25) 89,26.25 89,30.25 cw(c90.25,30.25) 90.25,31.5 92,31.5 ccw(c92,32.5) 93,32.5 93,33.75 ccw(c92,33.75) 92,34.75 90.25,34.75 cw(c90.25,36) 89,36 89,40.75 cw(c90,40.75) 90,41.75 92,41.75 ccw(c92,42.75) 93,42.75 93,43.5 ccw(c91.5,43.5) 91.5,45 90,45 cw(c90,46) 89,46 89,50.5 cw(c90.25,50.5) 90.25,51.75 91.75,51.75 ccw(c91.75,53) 93,53 93,53.75 ccw(c91.75,53.75) 91.75,55 85.25,55 ccw(c85.25,53.75) 84,53.75 84,24.75 cw(c82.75,24.75) 82.75,23.5 73,23.5 ccw(c73,22.5)
+5V on Top Layer "+5V Top Poly" (solid, remove dead copper, pour order 34): 72,22.5 72,17 ccw(c73.5,17) 73.5,15.5 81.5,15.5 cw(c81.5,14) 83,14 83,13 ccw(c84.5,13) 84.5,11.5 92,11.5 ccw(c92,12.5) 93,12.5 93,13.75 ccw(c92,13.75) 92,14.75 90.5,14.75 cw(c90.5,16.25) 89,16.25 89,20.25 cw(c90.25,20.25) 90.25,21.5 91.75,21.5 ccw(c91.75,22.75) 93,22.75 93,23.5 ccw(c91.75,23.5) 91.75,24.75 90.5,24.75 cw(c90.5,26.25) 89,26.25 89,30.25 cw(c90.25,30.25) 90.25,31.5 92,31.5 ccw(c92,32.5) 93,32.5 93,33.75 ccw(c92,33.75) 92,34.75 90.25,34.75 cw(c90.25,36) 89,36 89,40.75 cw(c90,40.75) 90,41.75 92,41.75 ccw(c92,42.75) 93,42.75 93,43.5 ccw(c91.5,43.5) 91.5,45 90,45 cw(c90,46) 89,46 89,50.5 cw(c90.25,50.5) 90.25,51.75 91.75,51.75 ccw(c91.75,53) 93,53 93,53.75 ccw(c91.75,53.75) 91.75,55 85.25,55 ccw(c85.25,53.75) 84,53.75 84,24.75 cw(c82.75,24.75) 82.75,23.5 73,23.5 ccw(c73,22.5)
NetC11_1 on Top Layer "+5V Unfused Top Poly" (solid, remove dead copper, pour order 30): 51,29.75 59.5,29.75 59.55,29.8 59.55,32.5 79,32.5 79,24.5 58,24.5 58,21.75 51,21.75
NetC3_1 on Top Layer "+8V4 Unfused Top Poly" (solid, remove dead copper, pour order 26): 51,49 59.5,49 59.5,52.95 59.55,53 79,53 79,46.5 71,46.5 71,45 58,45 58,41 51,41
NetC2_2 on Top Layer "+8V4 LX Top Poly" (solid, remove dead copper, pour order 25): 45.75,51.75 49,51.75 49,41 45.75,41
NetC10_2 on Top Layer "+5V LX Top Poly" (solid, remove dead copper, pour order 17): 45.75,32.5 49,32.5 49,21.75 45.75,21.75
"M1,2 Fused VIN" on Top Layer "M1,2 VIN Top Poly" (solid, remove dead copper, pour order 7): 28,61 5.75,61 5.75,55.5 18.5,55.5 18.5,51 28,51
"M3,4 Fused VIN" on Top Layer "M3,4 VIN Top Poly" (solid, pour order 6): 28,49 28,43 15,43 15,45.5 5.75,45.5 5.75,51 17.5,51 17.5,49
"M5,6 Fused VIN" on Top Layer "M5,6 VIN Top Poly" (solid, pour order 5): 28,41 28,36 5.75,36 5.75,40.95
"+24V Batt" on Top Layer "+24V Batt Top Poly" (solid, remove dead copper, pour order 1): 50.5,33.981 50.5,33.75 cw(c49.75,33.75) 49.75,33 29.5,33 ccw(c29.5,31.5) 28,31.5 28,29.75 cw(c25.25,29.75) 25.25,27 18.25,27 ccw(c18.25,24.75) 16,24.75 16,18.5 cw(c14,18.5) 14,16.5 7.75,16.5 cw(c7.75,18.5) 5.75,18.5 5.75,19 cw(c7.75,19) 7.75,21 10.5,21 ccw(c10.5,23.5) 13,23.5 13,28.25 cw(c14.75,28.25) 14.75,30 16.25,30 ccw(c16.25,32.25) 18.5,32.25 18.5,33.5 cw(c20,33.5) 20,35 27,35 ccw(c27,37) 29,37 29,55.75 cw(c30.25,55.75) 30.25,57 37.5,57 cw(c37.5,56) 38.5,56 ccw(c40.5,56) 40.5,54 49.75,54 cw(c49.75,53.25) 50.5,53.25 50.5,53 cw(c49.75,53) 49.75,52.25 40.25,52.25 ccw(c40.25,50.5) 38.5,50.5 38.5,37 ccw(c40.75,37) 40.75,34.75 49.731,34.75 cw(c49.731,33.981)
NetF6_1 on Top Layer "NONET_L01_P-001" (solid, remove dead copper, pour order 0): 29,32.5 36.5,32.5 36.5,20.5 29,20.5
GND on Bottom Layer "GND Bottom Poly" (hatched 45Degree grid 0.508 track 0.203, remove dead copper, pour order 45): 0,71 99,71 99,0 0,0
NetC11_1 on Bottom Layer "+5V Unfused Bottom Poly" (solid, remove dead copper, pour order 31): 51,29.75 59.5,29.75 59.55,29.8 59.55,32.5 79,32.5 79,24.5 58,24.5 58,21.75 51,21.75
NetC3_1 on Bottom Layer "+8V4 Unfused Bottom Poly" (solid, remove dead copper, pour order 29): 51,49 59.5,49 59.5,52.95 59.55,53 79,53 79,46.5 71,46.5 71,45 58,45 58,41 51,41
NetC2_2 on Bottom Layer "+8V4 LX Bottom Poly" (solid, remove dead copper, pour order 22): 45.75,51.75 49,51.75 49,41 45.75,41
NetC10_2 on Bottom Layer "+5V LX Bottom Poly" (solid, remove dead copper, pour order 18): 45.75,32.5 49,32.5 49,21.75 45.75,21.75
"M5,6 Fused VIN" on Bottom Layer "M5,6 VIN Bottom Poly" (solid, pour order 16): 28,41 28,36 5.75,36 5.75,40.95
"M3,4 Fused VIN" on Bottom Layer "M3,4 VIN Bottom Poly" (solid, pour order 13): 28,49 28,43 15,43 15,45.5 5.75,45.5 5.75,51 17.5,51 17.5,49
"M1,2 Fused VIN" on Bottom Layer "M1,2 VIN Bottom Poly" (solid, remove dead copper, pour order 9): 28,61 5.75,61 5.75,55.5 18.5,55.5 18.5,51 28,51
"+24V Batt" on Bottom Layer "+24V Batt Bottom Poly" (solid, remove dead copper, pour order 2): 50.5,33.981 50.5,33.75 cw(c49.75,33.75) 49.75,33 29.5,33 ccw(c29.5,31.5) 28,31.5 28,29.75 cw(c25.25,29.75) 25.25,27 18.25,27 ccw(c18.25,24.75) 16,24.75 16,18.5 cw(c14,18.5) 14,16.5 7.75,16.5 cw(c7.75,18.5) 5.75,18.5 5.75,19 cw(c7.75,19) 7.75,21 10.5,21 ccw(c10.5,23.5) 13,23.5 13,28.25 cw(c14.75,28.25) 14.75,30 16.25,30 ccw(c16.25,32.25) 18.5,32.25 18.5,33.5 cw(c20,33.5) 20,35 27,35 ccw(c27,37) 29,37 29,55.75 cw(c30.25,55.75) 30.25,57 37.5,57 cw(c37.5,56) 38.5,56 ccw(c40.5,56) 40.5,54 49.75,54 cw(c49.75,53.25) 50.5,53.25 50.5,53 cw(c49.75,53) 49.75,52.25 40.25,52.25 ccw(c40.25,50.5) 38.5,50.5 38.5,37 ccw(c40.75,37) 40.75,34.75 49.731,34.75 cw(c49.731,33.981)
NetC11_1 on Power Layer "+5V Unfused Middle 2 Poly" (solid, remove dead copper, pour order 32): 51,29.75 59.5,29.75 59.55,29.8 59.55,32.5 79,32.5 79,24.5 58,24.5 58,21.75 51,21.75
NetC3_1 on Power Layer "+8V4 Unfused Middle 2 Poly" (solid, remove dead copper, pour order 27): 51,49 59.5,49 59.5,52.95 59.55,53 79,53 79,46.5 71,46.5 71,45 58,45 58,41 51,41
NetC2_2 on Power Layer "+8V4 LX Middle 2 Poly" (solid, remove dead copper, pour order 23): 45.75,51.75 49,51.75 49,41 45.75,41
NetC10_2 on Power Layer "+5V LX Middle 2 Poly" (solid, remove dead copper, pour order 19): 45.75,32.5 49,32.5 49,21.75 45.75,21.75
"M5,6 Fused VIN" on Power Layer "M5,6 VIN Middle 2 Poly" (solid, pour order 15): 28,41 28,36 5.75,36 5.75,40.95
"M3,4 Fused VIN" on Power Layer "M3,4 VIN Middle 2 Poly" (solid, pour order 12): 28,49 28,43 15,43 15,45.5 5.75,45.5 5.75,51 17.5,51 17.5,49
"M1,2 Fused VIN" on Power Layer "M1,2 VIN Middle 2 Poly" (solid, remove dead copper, pour order 10): 28,61 5.75,61 5.75,55.5 18.5,55.5 18.5,51 28,51
GND on Ground Layer "GND Power Poly" (solid, pour order 43): 0,71 99,71 99,0 0,0

## Keep-outs
Keep-Out Layer:
  the board outline again, w0.2

## Silkscreen, mask and mechanical layers (free items; w line width, h text height)
Top Overlay:
  drawing of 23 lines, arcs and shapes, not listed
  text "-" at 74.17,67.75 h1.5
  text "+" at 79.25,67.75 h1.5
  text "Vservo" at 83,67.6 h1.2
  text "Vs PGOOD" at 20.25,67.5 h1
  text "+5V CONFIG" at 35.502,66.95 h1
  text "Vs CONFIG" at 47.751,66.95 h1
  text "+5V PGOOD" at 20.2,63.5 h1
  text "GND" at 38.21,60.134 h1 r90
  text "GND" at 49.96,60.134 h1 r90
  text "BIAS" at 43.29,59.301 h1 r90
  text "BIAS" at 55.04,59.301 h1 r90
  text "SYNC" at 40.75,59.135 h1 r90
  text "SYNC" at 52.5,59.135 h1 r90
  text "+" at 1.6,57.87 h1.5
  text "+" at 96.4,57.7 h1.5
  text "M1" at 1.1,55.33 h1.5
  text "+5V" at 86.5,54.511 h1.2 r90
  text "M1" at 17.7,53.2 h1.2 r90
  text "-" at 1.6,52.79 h1.5
  text "-" at 96.4,52.62 h1.5
  text "+" at 1.6,47.79 h1.5
  text "+" at 96.4,47.62 h1.5
  text "M2" at 0.851,45.25 h1.5
  text "M2" at 17.7,45 h1.2 r90
  text "+5V" at 86.5,44.431 h1.2 r90
  text "-" at 1.6,42.71 h1.5
  text "Vservo" at 80.5,42.601 h1.2 r90
  text "-" at 96.4,42.54 h1.5
  text "+" at 1.6,37.69 h1.5
  text "+" at 96.4,37.54 h1.5
  text "MOTOR DRIVERS" at 14.3,37.401 h1.2 r90
  text "M3" at 17.7,37 h1.2 r90
  text "M3" at 0.851,35.17 h1.5
  text "+5V" at 86.5,34.351 h1.2 r90
  text "-" at 1.6,32.61 h1.5
  text "-" at 96.4,32.46 h1.5
  text "BATT" at 17.7,27.801 h1.2 r90
  text "+" at 96.4,27.46 h1.5
  text "+5V" at 86.5,24.271 h1.2 r90
  text "+5V" at 80.5,22.401 h1.2 r90
  text "-" at 96.4,22.38 h1.5
  text "+" at 1.75,17.75 h1.5
  text "+" at 96.4,17.36 h1.5
  text "+5V" at 86.5,14.191 h1.2 r90
  text "VBATT" at 14.3,13.001 h1.2 r90
  text "-" at 1.75,12.67 h1.5
  text "-" at 96.4,12.28 h1.5
  text "+24V" at 53.1,11.3 h1.2 r90
  text "GND" at 58.18,11.3 h1.2 r90
  text "+5V" at 78.05,10.4 h1.2
  text "Vservo" at 78.05,6.4 h1.2
  text "Vs" at 67.6,3.751 h1.2 r90
  text "+5V" at 70.1,2.551 h1.2 r90
  text "+24V" at 78.05,2.4 h1.2
  text "GND" at 89.6,1.751 h1.2 r90
  text "TESTING ONLY" at 49.252,1.3 h1
Bottom Overlay:
  drawing of 22 lines, arcs and shapes, not listed
  text "M3" at 88,65.9 h1.2
  text "Designed by / Russell MacGregor" at 94.261,54.621 h1.2
  text "Rover Power Board" at 67.492,13.5 h3
  text "Board" at 14.875,7.35 h1.2
  text "V1" at 45.083,7.25 h2.5
  text "Dim" at 14.875,5.55 h1.2
  text "71mm" at 16.375,5.126 h1.2 r270
  text "99mm" at 14.199,3.1 h1.2
Poly Planning:
  lines w0.2: 50.5,53 50.5,52.25 ; 50.5,52.25 50.5,54 38.5,54 38.5,57 29,57 29,35 18.5,35 18.5,30 13,30 13,21 5.75,21 5.75,16.5 16,16.5 16,27 20.5,27 28,27 28,33 38.5,33 50.5,33 50.5,34.75 38.5,34.75 38.5,52.25 50.5,52.25 ; 5.75,36 28,36 28,41 5.75,41 5.75,36 ; 5.75,45.5 15,45.5 15,43 28,43 28,49 17.5,49 17.5,51 5.75,51 5.75,45.5 ; 5.75,55.5 18.5,55.5 18.5,51 28,51 28,61 5.75,61 5.75,55.5 ; 29,20.5 36.5,20.5 36.5,32.5 29,32.5 29,20.5 ; 45.75,21.75 45.75,32.5 49,32.5 49,21.75 45.75,21.75 ; 45.75,41 49,41 49,51.75 45.75,51.75 45.75,41 ; 51,21.75 58,21.75 58,24.5 72.5,24.5 79,24.5 79,32.5 59.5,32.5 59.5,29.75 51,29.75 51,21.75 ; 51,41 51,49 59.5,49 59.5,53 79,53 79,46.5 71,46.5 71,45 58,45 58,41 51,41 ; 72,15.5 72,23.5 84,23.5 84,55 93,55 93,51.75 89,51.75 89,45 93,45 93,41.75 89,41.75 89,34.75 93,34.75 93,31.5 89,31.5 89,24.75 93,24.75 93,21.5 89,21.5 89,14.75 93,14.75 93,11.5 83,11.5 83,15.5 72,15.5 ; 72.5,38.5 82.5,38.5 82.5,64.5 77.5,64.5 77.5,58 80,58 80,45.5 72.5,45.5 72.5,38.5

## Text inside footprints (layer, text, board x,y; h text height)
C3: Top Overlay "+" at 61.095,49.083 h1.5 r90
C4: Top Overlay "+" at 66.595,49.083 h1.5 r90
C7: Top Overlay "+" at 63.405,47.667 h1.5 r270
C8: Top Overlay "+" at 68.905,47.667 h1.5 r270
C11: Top Overlay "+" at 61.095,29.833 h1.5 r90
C12: Top Overlay "+" at 66.595,29.833 h1.5 r90
C15: Top Overlay "+" at 63.405,28.417 h1.5 r270
C16: Top Overlay "+" at 68.905,28.417 h1.5 r270
X2: Top Overlay "[Front]" at 4.958,60.502 h0.75 r270
X3: Top Overlay "[Front]" at 94.042,11.168 h0.75 r90